# Altium PCB HumNet.PcbDoc
Units mm, origin at the board's own origin, x right, y up, seen from the top; angles counter-clockwise.
Board outline 85.85 x 37.46 mm, 2 copper layers (Top Layer, Bottom Layer); 58 components, 42 nets, 215 pads, 61 vias.
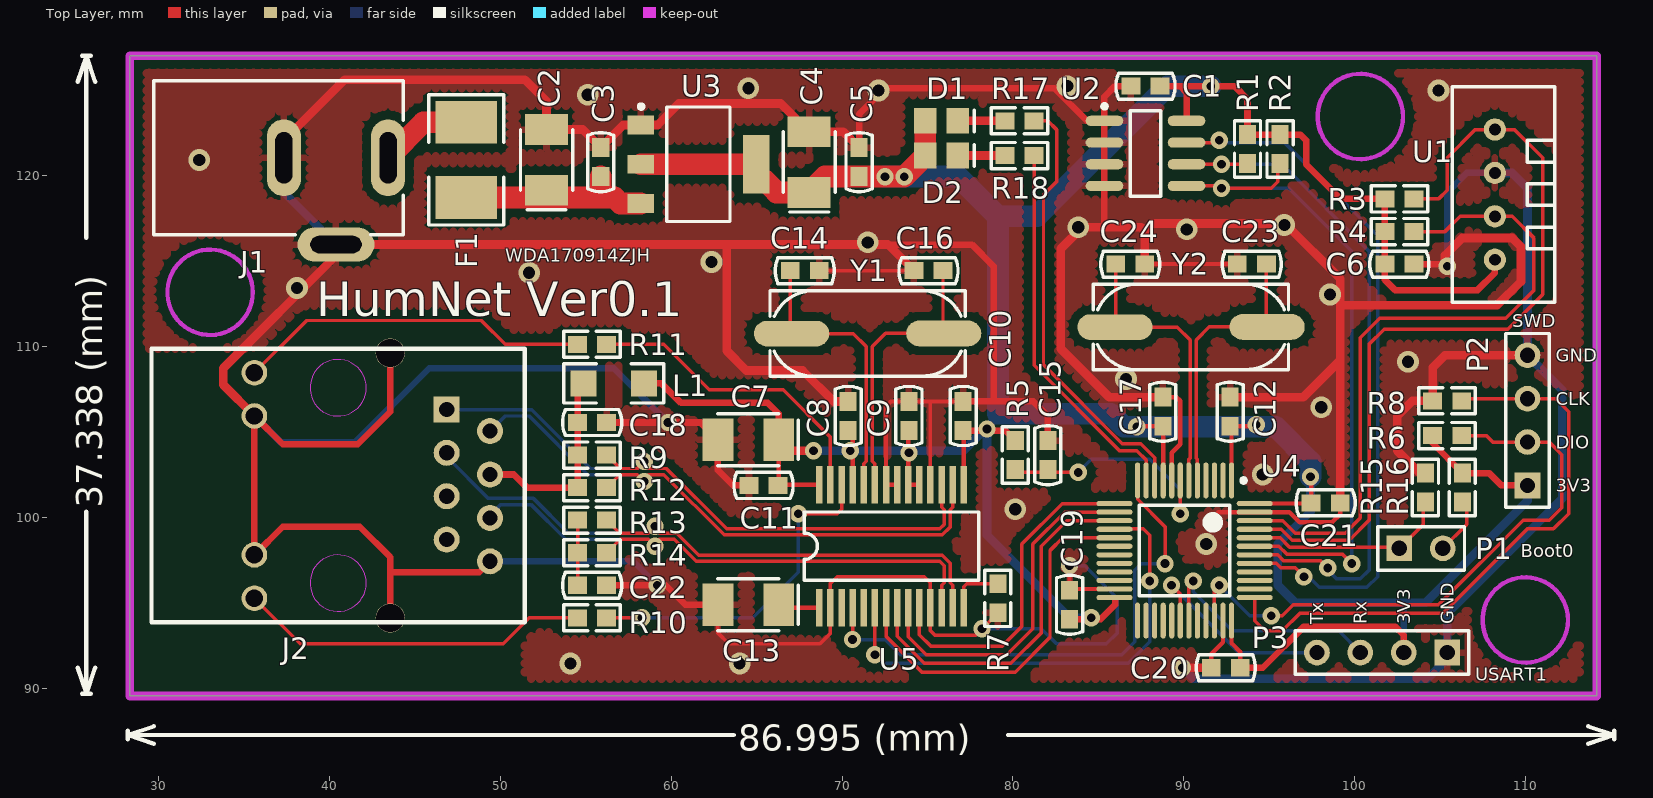
[diagram p0: Top Layer view]
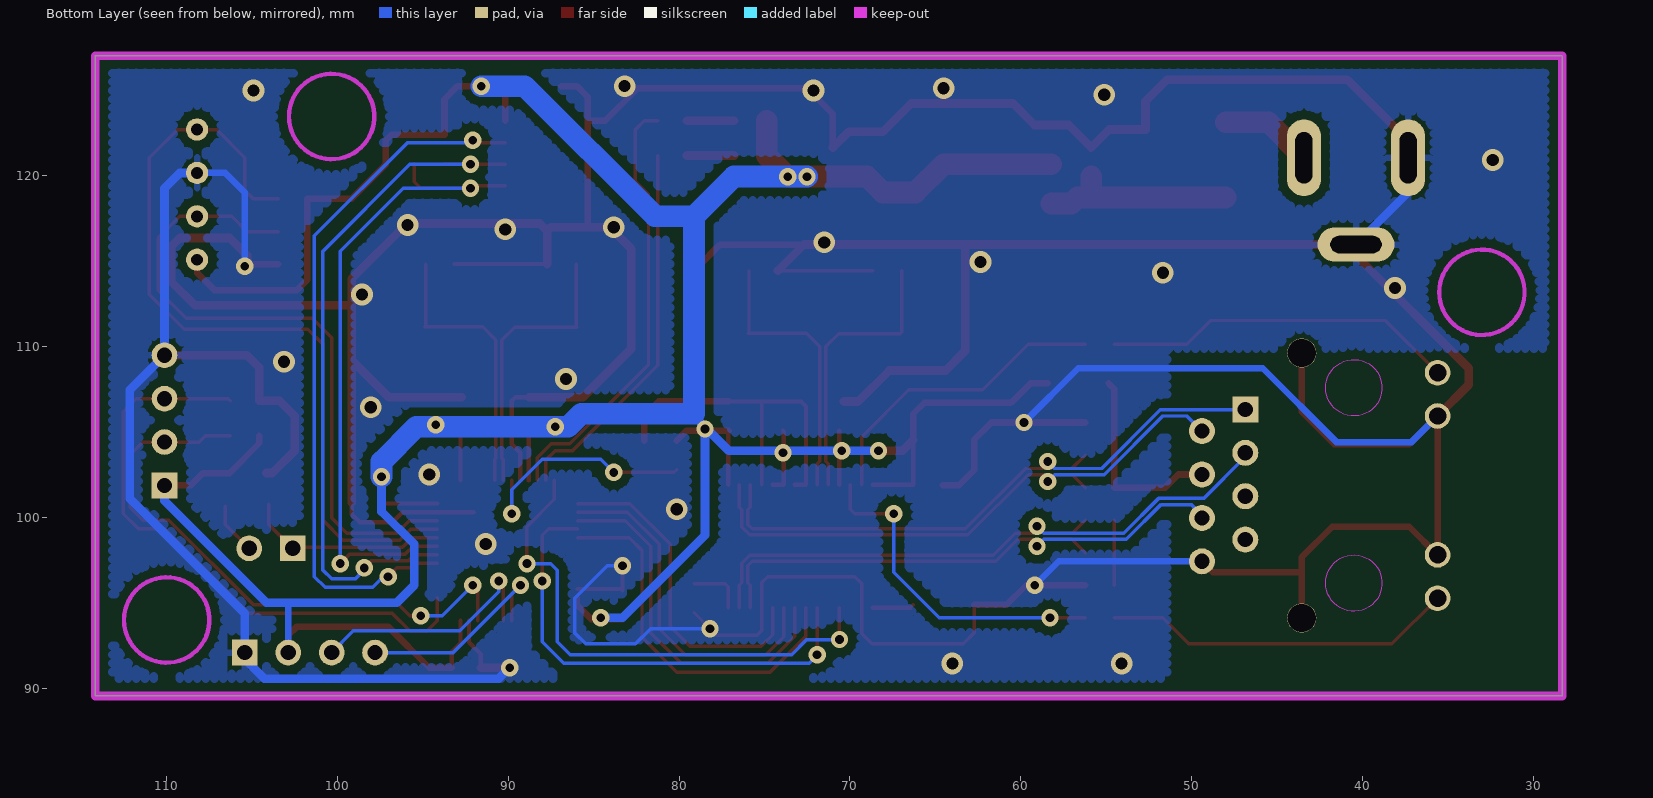
[diagram p1: Bottom Layer view, seen from below]

## Layer stack, top to bottom
Top Layer: signal copper 0.0356
Dielectric: dielectric 0.32, FR-4, Dk 4.8
Bottom Layer: signal copper 0.0356

## Board outline
28.321,89.535 114.173,89.535 114.173,127 28.321,127

## Design rules (kind name [scope] priority, off if disabled: settings)
Clearance Clearance_3 [(InDifferentialPairClass('All Differential Pairs')) vs (InDifferentialPairClass('All Differential Pairs'))] p1: gap=0.15
Clearance Clearance_2 [InNamedPolygon('Top Layer-GND') or InNamedPolygon('Bottom Layer-GND')] p2: gap=0.5
Clearance Clearance_1 [InComponent('U4')] p3: gap=0.127
Clearance [All] p4: gap=0.203
DiffPairsRouting [All] p1: maxlimit=0.254 minlimit=0.152 mostfreqgap=0.152 maxuncoupledlength=12.7
PolygonConnect PolygonConnect_1 [IsVia] p1: connectstyle=Direct reliefconductorwidth=0.254 reliefentries=4 polygonreliefangle="90 Angle" airgapwidth=0.254
PolygonConnect [All] p2: connectstyle=Relief reliefconductorwidth=0.381 reliefentries=4 polygonreliefangle="90 Angle" airgapwidth=0.254
RoutingVias [All] p1: holewidth=0.381 width=0.762 viastyle="Through Hole" minholewidth=0.381 minwidth=0.762 maxholewidth=12.7 maxwidth=25.4
SolderMaskExpansion [All] p1: expansion=0.102
Width [All] p1: maxlimit=2.54 minlimit=0.152 preferedwidth=0.203
27 further rules are at their usual default settings.

## Classes and differential pairs
differential pair TPOUT: +TPOUT_P -TPOUT_N
differential pair TPIN: +TPIN_P -TPIN_N
differential pair OSC: +OSC_P -OSC_N
differential pair OSC_8M: +OSC_8M_P -OSC_8M_N

## Components (designator, comment, footprint, x,y, rotation, side; value= is the part's Value field where it differs from the comment)
C1 "Cap" C-RAD-0603 87.757,125.222 r0 top
C2 "Cap Pol" CAP-3528 52.705,120.904 r90 top
C3 "Cap" C-RAD-0603 55.88,120.777 r270 top
C4 "Cap Pol" CAP-3528 68.072,120.777 r90 top
C5 "Cap" C-RAD-0603 70.993,120.777 r270 top
C6 "Cap" C-RAD-0603 102.616,114.808 r180 top
C7 "Cap Pol" CAP-3528 64.516,104.521 r180 top
C8 "Cap" C-RAD-0603 70.358,105.918 r270 top
C9 "Cap" C-RAD-0603 73.914,105.918 r270 top
C10 "Cap" C-RAD-0603 77.089,105.918 r270 top
C11 "Cap" C-RAD-0603 65.405,101.854 r0 top
C12 "Cap" C-RAD-0603 92.71,106.172 r270 top
C13 "Cap Pol" CAP-3528 64.516,94.869 r180 top
C14 "Cap" C-RAD-0603 67.818,114.427 r180 top
C15 "Cap" C-RAD-0603 82.042,103.632 r270 top
C16 "Cap" C-RAD-0603 75.057,114.427 r180 top
C17 "Cap" C-RAD-0603 88.773,106.172 r270 top
C18 "Cap" C-RAD-0603 55.372,105.537 r0 top
C19 "Cap" C-RAD-0603 83.312,94.869 r270 top
C20 "Cap" C-RAD-0603 92.456,91.186 r0 top
C21 "Cap" C-RAD-0603 98.298,100.838 r180 top
C22 "Cap" C-RAD-0603 55.372,96.012 r0 top
C23 "Cap" C-RAD-0603 93.98,114.808 r0 top
C24 "Cap" C-RAD-0603 86.868,114.808 r0 top
D1 "LED0" LED_0805 75.819,123.19 r0 top
D2 "LED0" LED_0805 75.819,121.158 r0 top
F1 "Fuse" 1812 48.006,120.904 r270 top
J1 "PWRCON" DC-005 44.323,121.031 r180 top
J2 "RJ45" HR911105A 40.513,101.854 r90 top locked
L1 "Inductor" 1206 56.642,107.823 r0 top
P1 "Header 2" HDR2X1_A 102.616,98.171 r0 top
P2 "Header 4" HDR4X1_A 110.109,101.854 r90 top
P3 "Header 4" HDR4X1_A 105.41,92.075 r180 top
R1 "Res1" 0603-1 93.726,121.539 r90 top
R2 "Res1" 0603-1 95.631,121.539 r90 top
R3 "Res1" 0603-1 102.616,118.618 r180 top
R4 "Res1" 0603-1 102.616,116.713 r180 top
R5 "Res1" 0603-1 80.137,103.632 r90 top
R6 "Res1" 0603-1 105.41,104.775 r0 top
R7 "Res1" 0603-1 79.121,95.25 r90 top
R8 "Res1" 0603-1 105.41,106.807 r0 top
R9 "Res1" 0603-1 55.372,103.632 r0 top
R10 "Res1" 0603-1 55.372,94.107 r0 top
R11 "Res1" 0603-1 55.372,110.109 r0 top
R12 "Res1" 0603-1 55.372,101.727 r0 top
R13 "Res1" 0603-1 55.372,99.822 r0 top
R14 "Res1" 0603-1 55.372,97.917 r0 top
R15 "Res1" 0603-1 104.14,101.727 r270 top
R16 "Res1" 0603-1 106.299,101.727 r270 top
R17 "Res1" 0603-1 80.391,123.19 r0 top
R18 "Res1" 0603-1 80.391,121.158 r0 top
U1 "DHT12" DHT11 108.204,115.062 r90 top
U2 "AT24C02" SOIC8_N 87.757,121.285 r0 top
U3 "ASM1117" SOT-223 61.595,120.65 r270 top
U4 "STM32F103C" LQFP-48_M 90.043,98.044 r270 top locked
U5 "ENC28J60" SSOP28 72.898,98.298 r90 top locked
Y1 "XTAL" X-SM49 71.501,110.744 r180 top
Y2 "XTAL" X-SM49 90.424,111.125 r180 top

## Footprints (in the part's own frame and the unit in brackets; to place one, negate y for a bottom-side part, rotate by r counter-clockwise, add the part's x,y. Pads: shape width x height; smd on the part's side, far side on the other; paste and mask are expansions set on the pad)
0603-1 [mm] "贴片带丝印"
  rect 1.1x1 smd: 1(-0.85,0) 2(0.85,0)
  silkscreen extent -1.65,-0.76 1.65,0.76, body extent -1.14,-0.38 1.14,0.38, height 1
1206 [mil] "贴片元件"
  rect 60x60 smd: 1(-70,0) 2(70,0)
  silkscreen extent -115,-45 115,45, body extent -75,-35 75,35, height 39
1812 [mm] "保险丝"
  rect 2.5x3.6 smd: 1(-2.2,0) 2(2.2,0)
  silkscreen extent -3.81,-2.2 3.81,2.2, body extent -2.54,-1.65 2.67,1.65, height 1.2
C-RAD-0603 [mm] "贴片电容"
  rect 1.1x1 smd: 1(-0.85,0) 2(0.85,0)
  silkscreen extent -1.73,-0.76 1.73,0.76, body extent -1.14,-0.38 1.14,0.38, height 1
CAP-3528 [mm] "钽电容"
  rect 1.8x2.5 smd: 1(-1.778,0) 2(1.778,0)
  silkscreen extent -2.92,-1.52 1.78,1.52, body extent -1.91,-1.4 1.91,1.4, height 1.1
DC-005 [mm] "DC母座5.5mm"
  oval 2x4.5 hole 1 slot 3 at 90 deg: 1(0.889,0) 2(6.985,0)
  oval 4.5x2 hole 1 slot 3 at 0 deg: 3(3.937,5.08)
  silkscreen extent 0,-4.5 14.6,4.5, body extent 0,-4.44 14.6,4.45, height 11
DHT11 [mm]
  round 1.3 hole 0.7: 1(0,0) 2(2.54,0) 3(5.08,0) 4(7.62,0)
  silkscreen extent -2.5,-3.5 10.12,2.5
HDR2X1_A [mm] "Connector; Header; 2 Position"
  rect 1.5x1.5 hole 0.9: 1(0,0)
  round 1.5 hole 0.9: 2(2.54,0)
  silkscreen extent -1.27,-1.27 3.81,1.27
HDR4X1_A [mm] "Connector; Header; 4 Position"
  rect 1.5x1.5 hole 0.9: 1(0,0)
  round 1.5 hole 0.9: 2(2.54,0) 3(5.08,0) 4(7.62,0)
  silkscreen extent -1.27,-1.27 8.89,1.27
HR911105A [mm]
  rect 1.524x1.524 hole 0.889: 1(4.45,-6.35)
  round 1.524 hole 0.889: 2(3.18,-8.89) 3(1.91,-6.35) 4(0.64,-8.89) 5(-0.63,-6.35) 6(-1.9,-8.89) 7(-3.17,-6.35) 8(-4.44,-8.89)
  round 1.5 hole 1.02: 9(6.6,4.9) 10(4.064,4.9) 11(-4.064,4.9) 12(-6.6,4.9)
  round 1.7 hole 1.65: 13(7.75,-3.048) 14(-7.75,-3.048)
  Keep-Out Layer circle w0.051: c5.716,0 r1.65
  Keep-Out Layer circle w0.051: c-5.714,0 r1.65
  silkscreen extent -8,-10.92 8,10.92
LED_0805 [mm] "贴片二极管"
  rect 1.3x1.5 smd: 1(-0.95,0) 2(0.95,0)
  silkscreen extent 1.91,-0.64 1.91,0.64
LQFP-48_M [mm] "Thin QFP, 48-Leads, Body 7x7mm, Pitch 0.5mm, IPC Low Density"
  oval 2.1x0.3 smd: 1(-4.1,2.75) 2(-4.1,2.25) 3(-4.1,1.75) 4(-4.1,1.25) 5(-4.1,0.75) 6(-4.1,0.25) 7(-4.1,-0.25) 8(-4.1,-0.75) 9(-4.1,-1.25) 10(-4.1,-1.75) 11(-4.1,-2.25) 12(-4.1,-2.75) 25(4.1,-2.75) 26(4.1,-2.25) 27(4.1,-1.75) 28(4.1,-1.25) 29(4.1,-0.75) 30(4.1,-0.25) 31(4.1,0.25) 32(4.1,0.75) 33(4.1,1.25) 34(4.1,1.75) 35(4.1,2.25) 36(4.1,2.75)
  oval 0.3x2.1 smd: 13(-2.75,-4.1) 14(-2.25,-4.1) 15(-1.75,-4.1) 16(-1.25,-4.1) 17(-0.75,-4.1) 18(-0.25,-4.1) 19(0.25,-4.1) 20(0.75,-4.1) 21(1.25,-4.1) 22(1.75,-4.1) 23(2.25,-4.1) 24(2.75,-4.1) 37(2.75,4.1) 38(2.25,4.1) 39(1.75,4.1) 40(1.25,4.1) 41(0.75,4.1) 42(0.25,4.1) 43(-0.25,4.1) 44(-0.75,4.1) 45(-1.25,4.1) 46(-1.75,4.1) 47(-2.25,4.1) 48(-2.75,4.1)
  silkscreen extent -4.22,-2.65 2.65,3.57, body extent -3.5,-3.5 3.5,3.5, height 1.6
SOIC8_N [mm] "8-Pin Small Outline Integrated Circuit Package (SOIC8), IPC Medium Density"
  oval 2.2x0.6 smd: 1(-2.4,1.905) 2(-2.4,0.635) 3(-2.4,-0.635) 4(-2.4,-1.905) 5(2.4,-1.905) 6(2.4,-0.635) 7(2.4,0.635) 8(2.4,1.905)
  silkscreen extent -2.52,-2.5 0.9,2.88, body extent -1.95,-2.45 1.95,2.45, height 1.75
SOT-223 [mm]
  rect 1.1x1.55 smd: 1(-2.3,-3.375) 2(0,-3.375) 3(2.3,-3.375)
  rect 3.45x1.55 smd: 4(0,3.375)
  silkscreen extent -3.5,-3.48 3.35,1.85, body extent -3.3,-3.94 3.3,3.43, height 0.8
SSOP28 [mm]
  rect 2.2x0.38 smd: 1(-3.6,4.225) 2(-3.6,3.575) 3(-3.6,2.925) 4(-3.6,2.275) 5(-3.6,1.625) 6(-3.6,0.975) 7(-3.6,0.325) 8(-3.6,-0.325) 9(-3.6,-0.975) 10(-3.6,-1.625) 11(-3.6,-2.275) 12(-3.6,-2.925) 13(-3.6,-3.575) 14(-3.6,-4.225) 15(3.6,-4.225) 16(3.6,-3.575) 17(3.6,-2.925) 18(3.6,-2.275) 19(3.6,-1.625) 20(3.6,-0.975) 21(3.6,-0.325) 22(3.6,0.325) 23(3.6,0.975) 24(3.6,1.625) 25(3.6,2.275) 26(3.6,2.925) 27(3.6,3.575) 28(3.6,4.225)
  silkscreen extent -2,-5.1 2,5.1
X-SM49 [mm]
  oval 4.4x1.5 smd: 1(4.45,0.004) 2(-4.45,-0.004)
  silkscreen extent -5.7,-2.5 5.72,2.5

## Part data
C1 C3 C5 C6 C8 C9 C10 C11 C12 C14 C15 C16 C17 C18 C19 C20 C21 C22 C23 C24: "无极性电容"
C2 C4 C7 C13: "极性电解电容"
D1 D2: "发光二极管"
F1: library part "Fuse 2", "保险丝"
J1: "直流电源端子"
J2: library part HR911105
L1: "电感"
P1 P2 P3: "接插件"
R1 R2 R3 R4 R5 R6 R7 R8 R9 R10 R11 R12 R13 R14 R15 R16 R17 R18: "贴片电阻"
U2: "EEROM存储器"
U3: "3.3V稳压芯片"
U4: "STM32单片机48引脚"
Y1 Y2: "晶振"

## Via types
v1: diameter 1.016, hole 0.508, Top Layer to Bottom Layer, tented both sides, 39 vias
v2: diameter 1.27, hole 0.711, Top Layer to Bottom Layer, tented both sides, 22 vias

## Nets (pads, with @x,y where several pads share a name; then routed paths per layer and width w, separated by ;. In a path a pad name is that pad's centre, name@x,y a point inside that pad or via, vN(x,y) a via of type N, cw(c..) or ccw(c..) an arc to the next point about the centre after c; other vN are vias at no path point)
BOOT0: P1.1 R15.2 U4.44 | length 12.1
  Top Layer w0.203: U4.44 95.637,98.794 96.183,98.247 102.54,98.247 P1.1@102.743,98.044 ; P1.1 104.013,99.568 R15.2@104.013,100.75
DHT12_SCL: R3.1 U1.4 U4.45 | length 48.1
  Top Layer w0.203: U4.45 95.711,99.294 96.352,98.654 99.67,98.654 100.838,99.822 100.838,110.109 101.727,110.998 108.966,110.998 110.998,113.03 110.998,121.031 109.347,122.682 U1.4 107.061,122.682 105.41,121.031 105.41,119.126 104.902,118.618 R3.1
DHT12_SDA: R4.1 U1.2 U4.46 | length 39.7
  Top Layer w0.203: U4.46 95.786,99.794 96.52,99.06 99.441,99.06 100.33,99.949 100.33,110.49 101.473,111.633 108.839,111.633 110.49,113.284 110.49,116.332 109.22,117.602 U1.2 106.172,117.602 105.283,116.713 R4.1
GND: C1.1 C2.2 C3.1 C4.2 C5.1 C6.1 C7.2 C8.1 C9.1 C10.1 C11.1 C12.1 C13.2 C14.1 C15.1 C16.2 C17.1 C18.2 C19.1 C20.1 C21.1 C22.2 C23.1 C24.2 J1.2 J1.3 J2.8 J2.10 J2.11 J2.13 J2.14 P2.4 P3.1 R7.1 R8.1 R15.1 U1.3 U2.1 U2.2 U2.3 U2.4 U3.1 U4.8 U4.23 U4.35 U4.47 U5.2 U5.11 U5.18 U5.21 U5.22 | length 488.7
  Top Layer w0.203: C13.2 62.738,93.218 63.373,92.583 68.707,92.583 69.323,93.199 U5.2 69.323,96.12 69.723,96.52 74.803,96.52 75.173,96.15 U5.11 75.173,93.356 75.438,93.091 77.812,93.091 v1(78.193,93.472) R7.1 ; C14.1 C16.2 ; U5.18 75.173,106.757 75.184,106.768
  Top Layer w0.254: U5.21 U5.22 72.573,106.482 72.859,106.768 C9.1 75.184,106.768 C10.1 ; v1(83.312,97.155) C19.1 83.387,95.794 U4.23 ; C24.2 C23.1 ; C17.1 89.574,107.022 89.789,106.807 89.789,104.267 89.293,103.771 U4.8 ; C20.1 91.606,91.987 92.293,92.674 U4.35 ; 92.007,100.294 U4.47 96.175,100.294 96.774,99.695 98.679,99.695 99.148,100.164 C21.1@99.148,100.711
  Top Layer w0.381: J2.14 43.561,97.663 41.783,99.441 37.264,99.441 J2.11 J2.10 37.264,104.267 41.656,104.267 43.561,106.172 J2.13 ; 43.561,96.774 48.763,96.774 J2.8 ; C22.2 v1(59.182,96.012) 59.69,96.012 60.833,94.869 C13.2 ; C18.2 61.722,105.537 C7.2 62.738,102.743 63.627,101.854 C11.1 ; C5.1 70.993,123.571 72.517,125.095 82.423,125.095 84.328,123.19 U2.1 ; 72.683,115.951 77.597,115.951 78.867,114.681 78.867,106.768 ; C10.1 78.867,106.768 ; C15.1 82.042,105.918 81.192,106.768 78.867,106.768 ; 85.357,116.98 U2.4 U2.3 U2.2 U2.1 ; C1.1 85.979,125.222 85.357,124.6 U2.1 ; C6.1 v1@105.283,114.808
  Top Layer w0.508: J2.10 33.782,107.749 33.782,108.712 40.386,115.316 J1.3 63.246,115.951 ; J1.2 37.338,122.047 40.894,125.603 51.435,125.603 52.705,124.333 C2.2 54.825,122.682 C3.1 57.203,122.95 U3.1 59.196,122.95 60.452,124.206 66.421,124.206 C4.2 70.065,122.555 C5.1 ; C8.1 69.508,106.768 67.691,108.585 64.389,108.585 63.246,109.728 63.246,115.951 ; C16.2 72.683,115.951 63.246,115.951 ; C24.2 87.718,116.752 ; C17.1 85.637,107.022 82.804,109.855 82.804,115.697 84.074,116.967 87.503,116.967 87.718,116.752 ; v1(89.916,91.186) C20.1 ; C12.1 96.989,107.022 99.148,109.181 ; C21.1 99.148,109.181 ; 99.148,112.395 108.331,112.395 109.728,113.792 109.728,115.824 109.22,116.332 106.299,116.332 105.283,115.316 v1@105.283,114.808 ; R15.1 103.798,102.577 102.489,103.886 102.489,105.918 103.378,106.807 R8.1 104.56,108.751 105.283,109.474 P2.4 ; 87.718,116.752 88.151,117.185 95.921,117.185 99.148,113.958 99.148,109.181
  Bottom Layer w0.203: v1(78.193,93.472) 81.661,93.472 82.55,92.583 85.471,92.583 86.106,93.218 86.106,95.25 84.201,97.155 v1(83.312,97.155)
  Bottom Layer w0.381: J2.10 37.137,104.394 41.529,104.394 45.847,108.712 56.642,108.712 v1(59.817,105.537) ; J2.8 57.78,97.414 v1(59.182,96.012) ; v1(105.41,114.681) 105.41,118.999 106.553,120.142 U1.3
  Bottom Layer w0.508: J1.2 37.338,118.999 J1.3 ; v1(89.916,91.186) 90.551,90.551 104.267,90.551 105.41,91.694 P3.1 105.41,94.361 112.141,101.092 112.141,107.442 P2.4 110.109,119.253 109.22,120.142 U1.3
  other v2: 54.102,91.44 64.008,91.44 91.313,98.425 80.137,100.457 94.615,102.489 98.044,106.426 86.614,108.077 103.124,109.093 98.552,113.03 38.1,113.411 51.689,114.3 62.357,114.935 71.501,116.078 90.17,116.84 83.82,116.967 95.885,117.094 32.385,120.904 55.118,124.714 72.136,124.968 104.902,124.968 64.516,125.095 83.185,125.222
IIC_SCL: R1.1 U2.6 U4.42 | length 40.6
  Top Layer w0.203: U2.6 v1(92.202,120.65) 93.687,120.65 R1.1 ; U4.42 95.487,97.794 95.847,97.434 98.019,97.434 v1(98.425,97.028)
  Bottom Layer w0.203: v1(92.202,120.65) 95.758,120.65 100.838,115.57 100.838,96.901 100.33,96.393 98.933,96.393 98.425,96.901 v1(98.425,97.028)
IIC_SDA: R2.1 U2.5 U4.43 | length 40.1
  Top Layer w0.203: U2.5 92.075,119.38 v1(92.202,119.253) 95.123,119.253 95.504,119.634 R2.1@95.504,120.689 ; U4.43 95.562,98.294 96.015,97.841 99.263,97.841 v1(99.822,97.282)
  Bottom Layer w0.203: v1(92.202,119.253) 96.139,119.253 99.822,115.57 v1(99.822,97.282)
IIC_WP: U2.7 U4.41 | length 41.7
  Top Layer w0.203: U2.7 v1@91.948,121.92 ; U4.41 95.412,97.294 95.678,97.028 96.52,97.028 v1(97.028,96.52)
  Bottom Layer w0.203: v1@91.821,121.92 95.885,121.92 101.346,116.459 101.346,96.52 100.711,95.885 97.917,95.885 97.155,96.647 v1(97.028,96.52)
  other v1: 92.075,122.047
LEDA: R11.2 U5.27 | length 18.1
  Top Layer w0.203: R11.2 59.563,110.109 62.23,107.442 66.548,107.442 69.323,104.667 U5.27
LEDB: R10.2 U5.26 | length 19.8
  Top Layer w0.203: R10.2 v1(58.293,94.107) ; v1(67.437,100.203) 69.723,100.203 69.973,100.453 U5.26
  Bottom Layer w0.203: v1(58.293,94.107) 64.77,94.107 67.437,96.774 v1(67.437,100.203)
NET_CS: U4.14 U5.9 | length 20.6
  Top Layer w0.203: U5.9 73.873,93.005 74.93,91.948 79.629,91.948 81.153,93.472 81.153,98.425 83.022,100.294 U4.14
NET_INT: U4.12 U5.4 | length 30.7
  Top Layer w0.203: v1@70.623,92.837 U5.4 ; U4.12 87.293,101.048 88.9,99.441 v1(88.9,97.282)
  Bottom Layer w0.203: v1(70.612,92.837) 72.517,92.837 73.406,91.948 86.36,91.948 87.122,92.71 87.122,96.901 87.503,97.282 v1(88.9,97.282)
NET_MISO: U4.16 U5.6 | length 28.1
  Top Layer w0.203: v1(71.923,91.948) U5.6 ; U4.16 85.963,99.314 87.63,99.314 88.011,98.933 v1(88.011,96.266)
  Bottom Layer w0.203: v1@71.882,91.948 72.39,91.44 86.741,91.44 88.011,92.71 v1(88.011,96.266)
NET_MOSI: U4.17 U5.7 | length 22.1
  Top Layer w0.203: U5.7 72.573,93.035 74.676,90.932 80.137,90.932 82.169,92.964 82.169,98.044 82.919,98.794 U4.17
NET_RST: U4.13 U5.10 | length 19.6
  Top Layer w0.203: U5.10 74.523,93.117 75.184,92.456 79.375,92.456 80.518,93.599 80.518,98.425 82.887,100.794 U4.13
NET_SCK: U4.15 U5.8 | length 21.5
  Top Layer w0.203: U5.8 73.223,93.02 74.803,91.44 79.883,91.44 81.661,93.218 81.661,98.298 83.157,99.794 U4.15
NetC13_1: C13.1 U5.1 | length 2.4
  Top Layer w0.203: C13.1 C13.1@66.465,94.698
  Top Layer w0.254: C13.1@66.465,94.698 U5.1
NetC15_2: C15.2 R5.1 U4.7 | length 14.1
  Top Layer w0.203: R5.1 80.303,102.616 v1(83.82,102.616) ; v1(89.793,100.199) U4.7
  Bottom Layer w0.203: v1(83.82,102.616) 84.582,103.378 88.011,103.378 89.793,101.596 v1(89.793,100.199)
NetC18_1: C18.1 J2.4 L1.1 R9.1 R12.1 | length 11.7
  Top Layer w0.381: J2.4 50.795,102.494 51.562,101.727 R12.1 R9.1 C18.1 54.522,107.481 L1.1
NetC22_1: C22.1 R13.1 R14.1 | length 3.8
  Top Layer w0.203: C22.1 R14.1 R13.1
NetD1_2: D1.2 R17.1 | length 2.8
  Top Layer w0.508: D1.2 R17.1
NetD2_2: D2.2 R18.1 | length 2.8
  Top Layer w0.508: D2.2 R18.1
NetJ2_9: J2.9 R11.1 | length 20.8
  Top Layer w0.203: J2.9 38.665,111.506 48.895,111.506 50.292,110.109 R11.1
NetJ2_12: J2.12 R10.1 | length 20.6
  Top Layer w0.203: J2.12 38.284,92.583 50.165,92.583 51.689,94.107 R10.1
NetP1_2: P1.2 R16.2 | length 3
  Top Layer w0.203: P1.2 106.553,99.568 R16.2@106.553,100.623
NetR7_2: R7.2 U5.14 | length 3.3
  Top Layer w0.203: U5.14 77.123,95.919 77.304,96.1 R7.2
NetR17_2: R17.2 U4.10 | length 25.7
  Top Layer w0.203: R17.2 82.042,123.19 82.55,122.682 82.55,119.634 81.788,118.872 81.788,108.906 86.401,104.292 87.478,104.292 88.293,103.477 U4.10
NetR18_2: R18.2 U4.11 | length 22.3
  Top Layer w0.203: R18.2 81.241,108.878 86.233,103.886 87.249,103.886 87.793,103.342 U4.11
OSC_8M_N: C23.2 U4.5 Y2.2 | length 16.4
  Top Layer w0.203: U4.5 90.793,103.378 90.721,103.45 90.721,110.363 91.487,111.129 Y2.2 ; Y2.2@94.83,111.173 C23.2
OSC_8M_P: C24.1 U4.6 Y2.1 | length 16.6
  Top Layer w0.203: Y2.1 89.608,111.121 90.365,110.363 90.365,103.45 90.293,103.378 U4.6 ; Y2.1@86.018,111.165 C24.1
OSC_N: C16.1 U5.23 Y1.2 | length 16.3
  Top Layer w0.203: U5.23 71.923,103.124 71.776,103.271 71.776,109.982 72.542,110.748 Y1.2 75.907,110.792 C16.1
OSC_P: C14.2 U5.24 Y1.1 | length 16.5
  Top Layer w0.203: C14.2 66.968,110.823 Y1.1 70.663,110.74 71.42,109.982 71.42,103.271 71.273,103.124 U5.24
SWCLK: P2.3 R8.2 U4.37 | length 35.4
  Top Layer w0.203: U4.37 94.143,93.944 94.742,93.345 95.758,93.345 96.774,94.361 105.156,94.361 110.109,99.314 111.633,99.314 112.522,100.203 112.522,106.172 111.76,106.934 P2.3 106.387,106.934 R8.2
SWDIO: P2.2 R6.2 U4.34 | length 35
  Top Layer w0.203: U4.34 91.793,95.73 v1(92.075,96.012) ; v1(95.123,94.234) 95.758,94.234 96.393,94.869 104.902,94.869 109.855,99.822 111.379,99.822 112.116,100.559 112.116,103.657 111.379,104.394 P2.2 108.077,104.394 107.696,104.775 R6.2
  Bottom Layer w0.203: v1(92.075,96.012) 93.853,94.234 v1(95.123,94.234)
TPIN_N: J2.6 R14.2 U5.12 | length 34.7
  Top Layer w0.203: R14.2 57.009,98.704 58.649,98.704 v1(59.055,98.298) 59.055,98.45 59.309,98.704 60.178,98.704 61.473,97.409 75.716,97.409 75.97,97.155 75.97,96.159 75.823,96.012 U5.12
  Bottom Layer w0.203: J2.6 49.403,100.101 50.038,100.736 51.796,100.736 53.828,98.704 58.649,98.704 v1(59.055,98.298)
TPIN_P: J2.3 R13.2 U5.13 | length 38.7
  Top Layer w0.203: R13.2 56.984,99.06 58.649,99.06 v1(59.055,99.466) 59.055,99.314 59.309,99.06 60.325,99.06 61.62,97.765 75.863,97.765 76.326,97.302 76.326,96.159 76.473,96.012 U5.13
  Bottom Layer w0.203: J2.3 46.863,103.525 49.296,101.092 51.943,101.092 53.975,99.06 58.649,99.06 v1(59.055,99.466)
TPOUT_N: J2.2 R12.2 U5.16 | length 36
  Top Layer w0.203: R12.2 56.984,102.489 58.014,102.489 v1(58.42,102.083) 58.42,102.235 58.674,102.489 59.568,102.489 63.099,98.958 75.863,98.958 76.326,99.421 76.326,100.437 76.473,100.584 U5.16
  Bottom Layer w0.203: J2.2 50.287,105.918 51.694,105.918 55.123,102.489 58.014,102.489 v1(58.42,102.083)
TPOUT_P: J2.1 R9.2 U5.17 | length 37.6
  Top Layer w0.203: R9.2 57.009,102.845 58.014,102.845 v1(58.42,103.251) 58.42,103.099 58.674,102.845 59.715,102.845 63.246,99.314 75.716,99.314 75.97,99.568 75.97,100.437 75.823,100.584 U5.17
  Bottom Layer w0.203: J2.1 46.893,106.274 51.841,106.274 55.27,102.845 58.014,102.845 v1(58.42,103.251)
U1_RX: P3.3 U4.31 | length 14.3
  Top Layer w0.203: U4.31 90.293,96.008 v1(90.551,96.266)
  Bottom Layer w0.203: v1(90.551,96.266) 90.551,95.631 92.837,93.345 99.06,93.345 P3.3
U1_TX: P3.4 U4.30 | length 12.4
  Top Layer w0.203: v1(89.281,96.012) 89.793,95.5 U4.30
  Bottom Layer w0.203: v1(89.281,96.012) 93.218,92.075 P3.4
VCC_3V3: C1.2 C4.1 C5.2 C6.2 C7.1 C8.2 C9.2 C10.2 C11.2 C12.2 C17.2 C19.2 C20.2 C21.2 D1.1 D2.1 L1.2 P2.1 P3.2 R1.2 R2.2 R3.2 R4.2 R5.2 R6.1 R16.1 U1.1 U2.8 U3.2 U3.4 U4.1 U4.9 U4.24 U4.36 U4.48 U5.15 U5.19 U5.20 U5.25 U5.28 | length 233
  Top Layer w0.254: C7.1@66.299,104.516 66.299,101.898 U5.28 ; C8.2@70.612,105.068 70.623,105.057 U5.25 ; C9.2 73.873,105.027 U5.20 U5.19 ; C10.2 77.123,105.034 U5.15 ; v1(87.249,105.283) 87.288,105.322 C17.2 88.793,105.302 U4.9 ; U4.36 92.793,92.627 93.306,92.114 C20.2 ; U4.1 92.793,105.239 C12.2 94.146,105.322 v1(94.234,105.41) ; U4.48 C21.2@97.365,100.794 ; v1(97.409,102.362) 97.448,102.323 C21.2
  Top Layer w0.381: L1.2 59.436,107.823 60.579,106.68 65.659,106.68 66.294,106.045 C7.1 ; C10.2 79.551,105.068 R5.2 ; C19.2 85.129,94.019 85.979,94.869 U4.24@85.979,95.25 ; C1.2 89.789,125.222 ; U2.8 90.157,124.854 89.789,125.222 ; C20.2 94.615,91.186 97.028,93.599 102.362,93.599 102.87,93.091 P3.2 ; R6.1 104.56,104.316 R16.1 107.862,102.577 108.585,101.854 P2.1 ; U1.1 108.204,114.3 107.188,113.284 102.362,113.284 101.766,113.88 C6.2 R4.2 R3.2 99.187,118.618 97.155,120.65 97.155,122.047 96.813,122.389 R2.2 R1.2 93.726,124.46 92.964,125.222 v1(91.567,125.222) 89.789,125.222
  Top Layer w0.508: C7.1 66.299,104.516 66.929,103.886 v1(68.326,103.886)
  Top Layer w1.27: U3.2 64.516,120.65 66.167,118.999 C4.1 69,119.927 C5.2 v1(72.517,119.927) v1(73.638,119.927) D2.1 D1.1
  Bottom Layer w0.381: 102.743,94.996 102.87,94.869 P3.2
  Bottom Layer w0.508: v1(68.326,103.886) v1(70.485,103.886) 77.089,103.886 79.121,105.918 79.121,106.045 ; v1(78.486,105.156) 78.486,98.933 83.312,94.107 v1(84.582,94.107) ; v1(97.409,102.362) 97.409,100.33 95.504,98.425 95.504,96.012 96.52,94.996 102.743,94.996 104.14,94.996 110.109,100.965 P2.1
  Bottom Layer w1.27: v1(72.517,119.927) 76.796,119.927 79.121,117.602 ; v1(91.567,125.222) 89.027,125.222 81.407,117.602 79.121,117.602 ; v1(97.409,102.362) 97.409,103.251 95.377,105.283 86.487,105.283 85.725,106.045 79.121,106.045 79.121,117.602
  other v1: 73.914,103.759
VCC_5V: C2.1 C3.2 F1.2 U3.3 | length 11.6
  Top Layer w1.27: F1.2 55.88,118.704 ; C3.2 55.88,118.704 ; U3.3 57.037,118.35 56.683,118.704 55.88,118.704
VCC_5VIN: F1.1 J1.1 | length 5.4
  Top Layer w1.27: J1.1 45.507,123.104 F1.1
pads on no net: J2.5 J2.7 U4.2 U4.3 U4.4 U4.18 U4.19 U4.20 U4.21 U4.22 U4.25 U4.26 U4.27 U4.28 U4.29 U4.32 U4.33 U4.38 U4.39 U4.40 U5.3 U5.5

## Polygon pours and split planes (outlines as drawn)
GND on Top Layer "Top Layer-GND" (hatched 90Degree grid 0.508 track 0.508, remove dead copper, pour order 2): 28.448,127.127 28.448,89.662 114.3,89.662 114.3,127.127 28.448,127.127
GND on Bottom Layer "Bottom Layer-GND" (hatched 90Degree grid 0.508 track 0.508, remove dead copper, pour order 2): 28.321,127 28.321,89.535 114.173,89.535 114.173,127 28.321,127

## Keep-outs
Keep-Out Layer:
  circle w0.254: c109.982,93.98 r2.5
  circle w0.254: c100.33,123.444 r2.5
  circle w0.254: c33.02,113.157 r2.5
  lines w0.508: 28.321,89.535 28.321,93.218 28.321,127 114.173,127 114.173,89.535 28.321,89.535

## Other copper
Top Layer:
  pour cut-out: 51.435,109.855 51.435,89.535 28.321,89.535 28.321,109.855
Bottom Layer:
  pour cut-out: 51.435,109.855 51.435,89.535 28.321,89.535 28.321,109.855

## Silkscreen, mask and mechanical layers (free items; w line width, h text height)
Top Overlay:
  lines w0.254: 25.273,91.186 25.781,89.662 ; 25.273,125.476 25.781,127 ; 25.527,89.662 26.035,89.662 ; 25.527,127 26.035,127 ; 25.781,100.307 25.781,89.662 ; 25.781,116.355 25.781,127 ; 26.289,91.186 25.781,89.662 ; 26.289,125.476 25.781,127 ; 28.194,86.995 28.194,87.503 ; 29.718,86.741 28.194,87.249 ; 29.718,87.757 28.194,87.249 ; 63.668,87.249 28.194,87.249 ; 79.715,87.249 115.189,87.249 ; 113.665,86.741 115.189,87.249 ; 113.665,87.757 115.189,87.249 ; 115.189,86.995 115.189,87.503
  text "WDA170914ZJH" at 50.292,114.935 h0.76
  text "HumNet Ver0.1" at 39.243,111.76 h2.03
  text "SWD" at 109.22,111.125 h0.76
  text "GND" at 111.76,109.093 h0.76
  text "CLK" at 111.76,106.553 h0.76
  text "DIO" at 111.76,104.013 h0.76
  text "3V3" at 111.76,101.473 h0.76
  text "37.338 (mm)" at 26.695,100.561 h1.52 r90
  text "Boot0" at 109.728,97.663 h0.76
  text "Tx" at 98.171,93.726 h0.76 r90
  text "Rx" at 100.711,93.726 h0.76 r90
  text "3V3" at 103.251,93.726 h0.76 r90
  text "GND" at 105.791,93.726 h0.76 r90
  text "USART1" at 107.061,90.424 h0.76
  text "86.995 (mm)" at 63.922,86.335 h1.52